# Altium PCB QSTL_MicroDSUB_FFC.PcbDoc
Units mm, origin at the board's own origin, x right, y up, seen from the top; angles counter-clockwise.
Board outline 26 x 44 mm, 4 copper layers (Top Layer, L2, L3, Bottom Layer), stack 0.603 mm thick; 13 components, 25 nets, 87 pads, 506 vias.
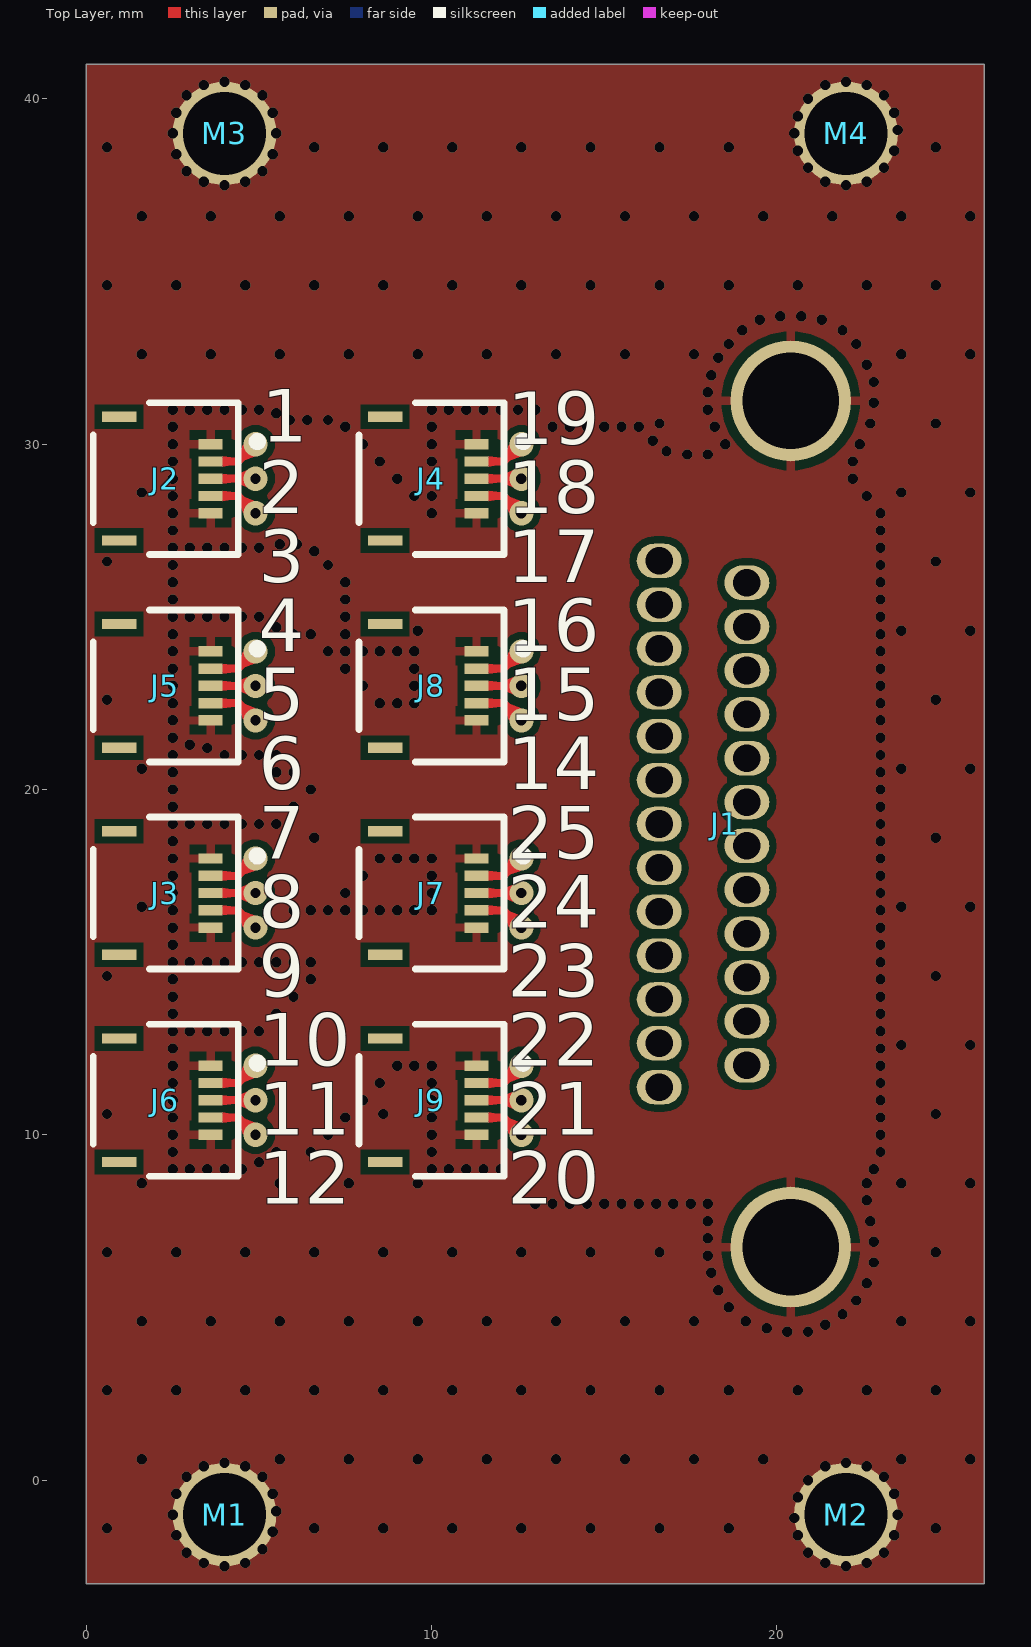
[diagram p0: Top Layer view]
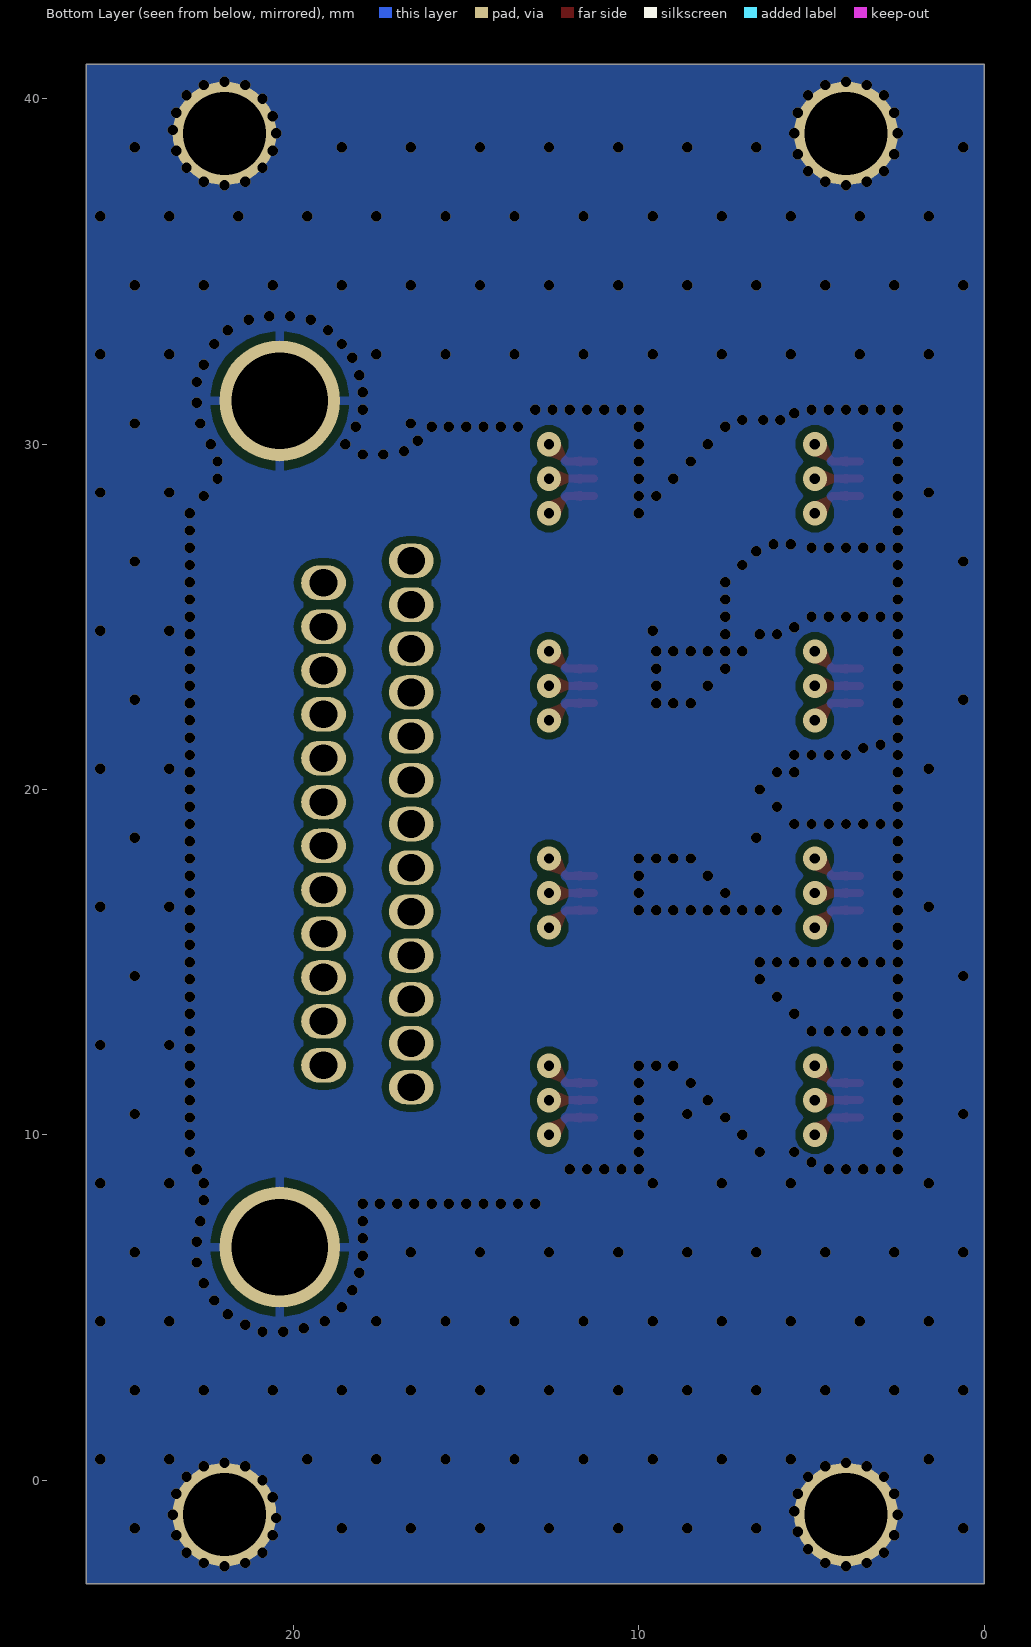
[diagram p1: Bottom Layer view, seen from below]
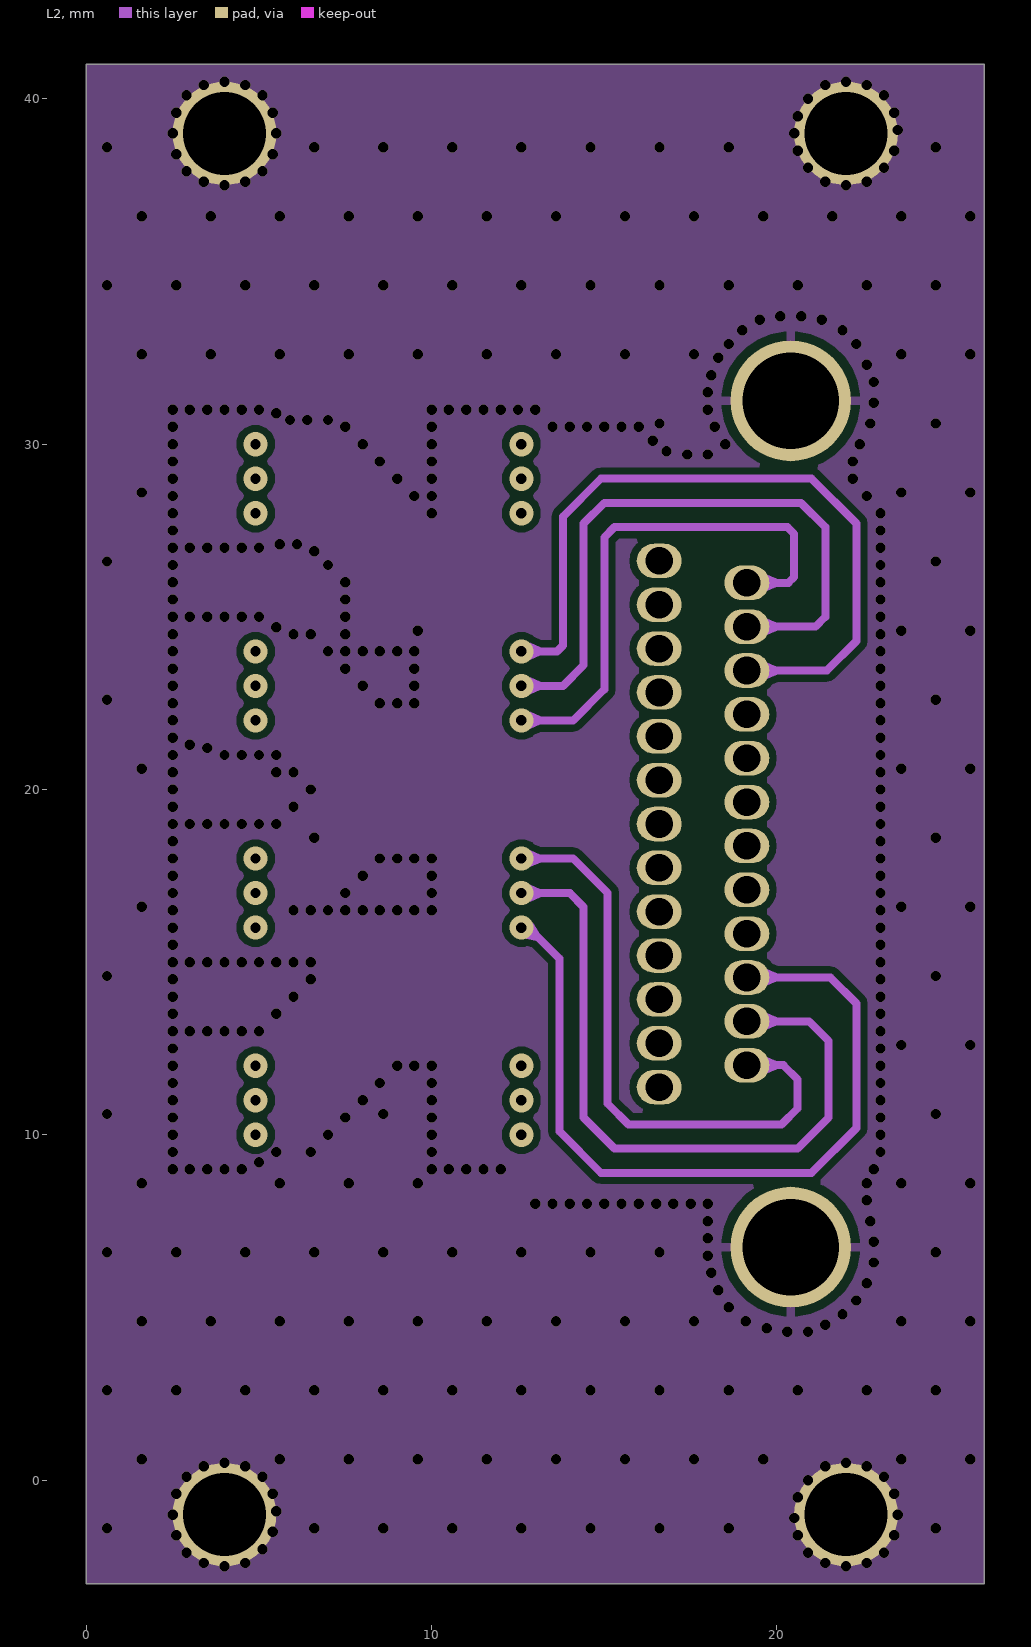
[diagram p2: L2]
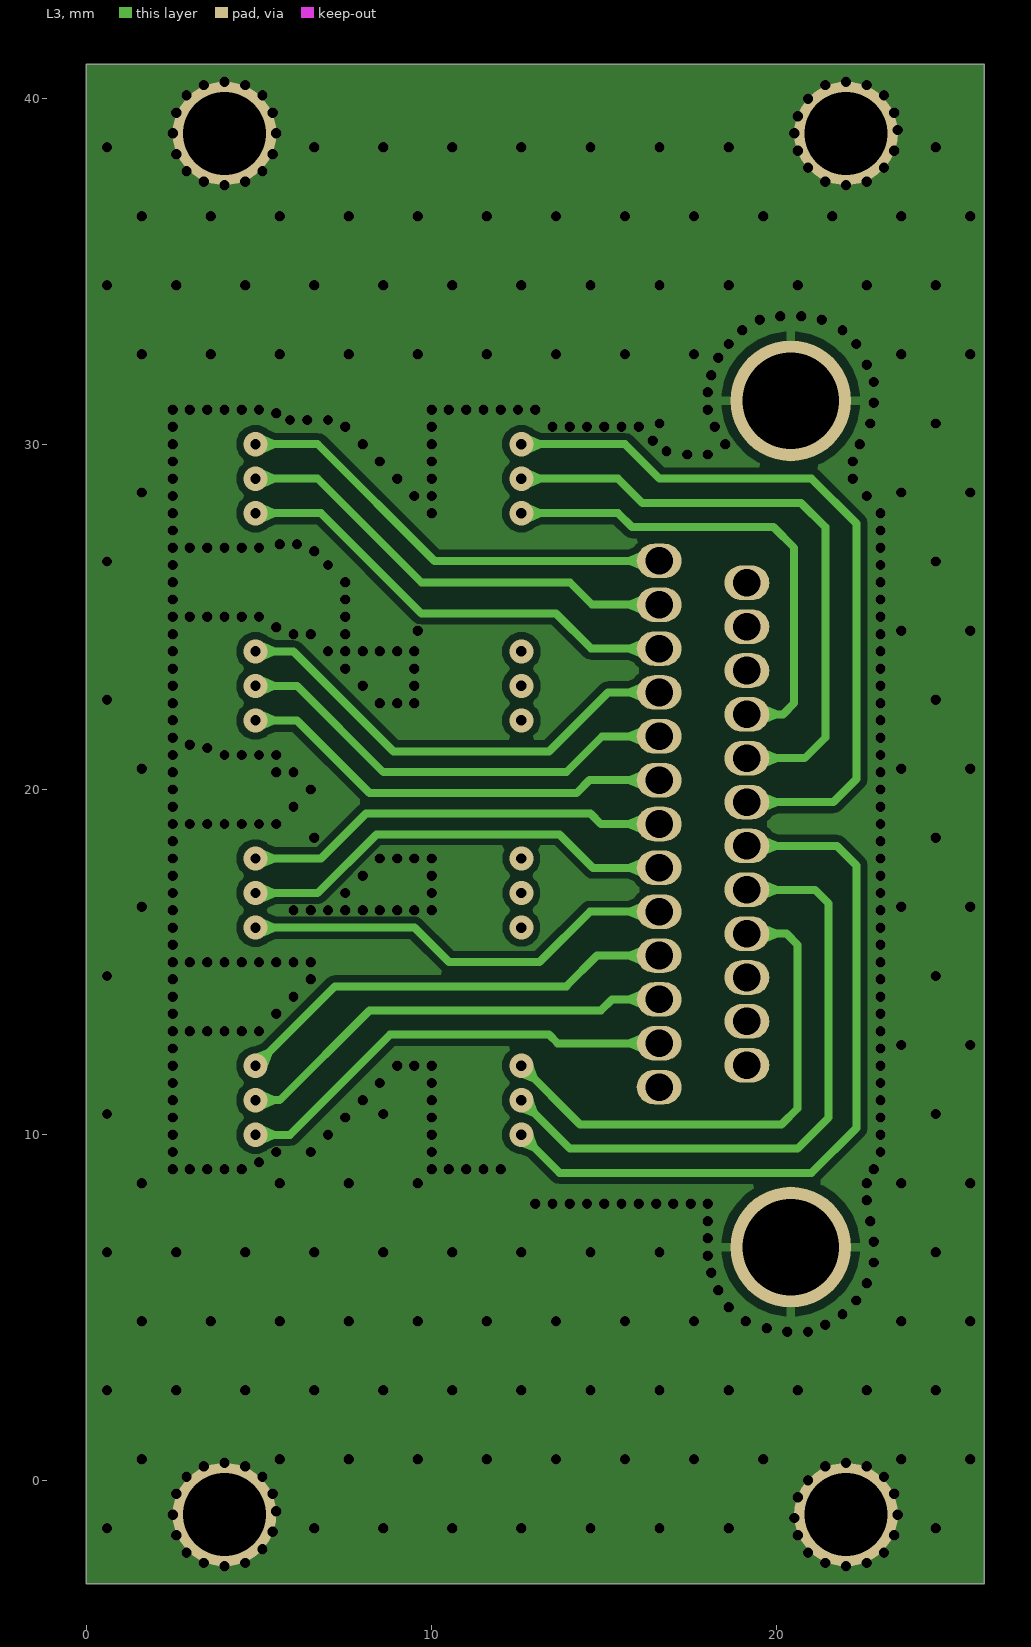
[diagram p3: L3]
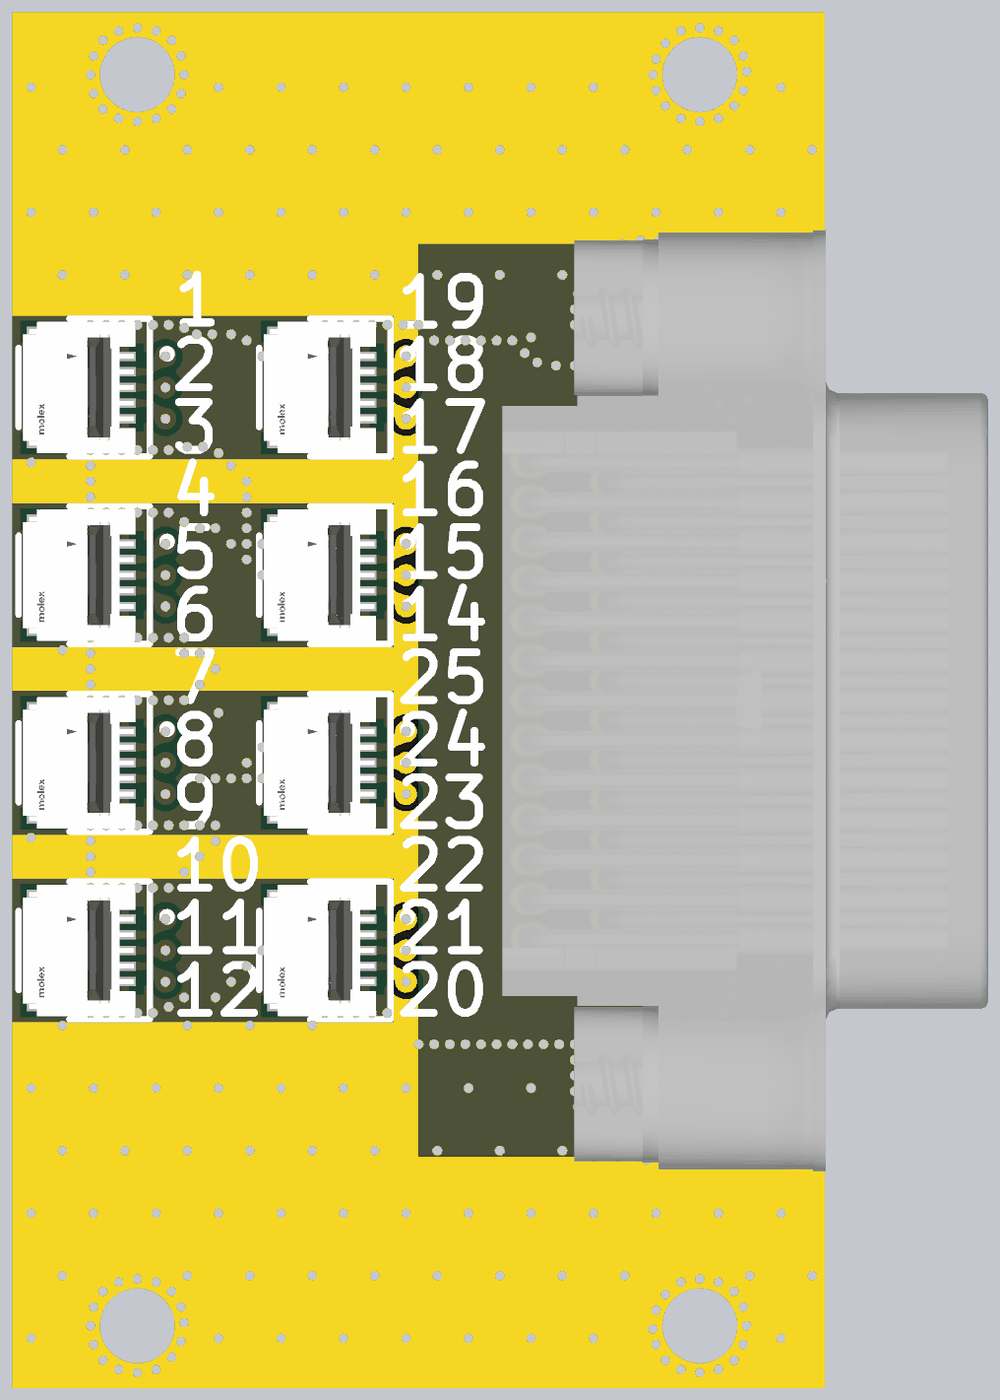
[diagram p4: 3D render of the assembled board from above, using the file's embedded part models]

## Layer stack, top to bottom
Top Solder: solder mask 0.0102, Solder Resist, Dk 3.5
Top Layer: signal copper 0.0356
Dielectric 2: prepreg 0.0711, PP-006, Dk 4.1
L2: signal copper 0.035
Dielectric 1: dielectric 0.32, FR-4, Dk 4.8
L3: signal copper 0.035
Dielectric 3: prepreg 0.0711, PP-006, Dk 4.1
Bottom Layer: signal copper 0.0356
Bottom Solder: solder mask 0.0102, Solder Resist, Dk 3.5

## Board outline
0,-3 26,-3 26,41 0,41

## Design rules (kind name [scope] priority, off if disabled: settings)
Clearance [All] p1: gap=0.2 ignorepadtopadclearanceinfootprint=FALSE except(0: Arc-Hole Track-Hole SMDPad-Hole THPad-Hole Via-Hole Fill-Hole Poly-Hole Region-Hole Text-Hole; 0.1: Arc-Arc Arc-Track Track-Track; 0.254: Arc-SMDPad Arc-THPad Arc-Text Track-SMDPad Track-THPad Track-Text SMDPad-SMDPad SMDPad-THPad SMDPad-Text THPad-THPad THPad-Text Via-Text Fill-Text Poly-Text Region-Text Text-Text)
MatchedLengths [1 or 2 or 3 or 4 or 5 or 6 or 7 or 8 or 9 or 10] p1: tolerance=25.4 checknetsindiffpair=FALSE checkdiffpairvsdiffpair=TRUE checkxsignals=TRUE checkothers=TRUE usedelayunits=TRUE delaytolerance=100.000000
PlaneConnect [All] p1: pad.planeconnectstyle=Relief pad.reliefexpansion=0.508 pad.reliefentries=4 pad.reliefconductorwidth=0.254 pad.reliefairgap=0.254 via.planeconnectstyle=Direct via.reliefexpansion=0.508 via.reliefentries=4 via.reliefconductorwidth=0.254 via.reliefairgap=0.254
PolygonConnect [All] p1: thpad.connectstyle=Direct thpad.reliefconductorwidth=0.254 thpad.reliefentries=4 thpad.polygonreliefangle="90 Angle" thpad.airgapwidth=0.254 smdpad.connectstyle=Relief smdpad.reliefconductorwidth=0.254 smdpad.reliefentries=4 smdpad.polygonreliefangle="90 Angle" smdpad.airgapwidth=0.254 via.connectstyle=Direct via.reliefconductorwidth=0.254 via.reliefentries=4 via.polygonreliefangle="90 Angle" via.airgapwidth=0.254
RoutingVias [All] p1: holewidth=0.711 width=1.27 viastyle="Through Hole" minholewidth=0.711 minwidth=1.27 maxholewidth=0.711 maxwidth=1.27
SolderMaskExpansion [All] p1: expansion=0.102 istentingtop=FALSE
Width [All] p1: maxlimit=0.294 minlimit=0.254 preferedwidth=0.294 toplayer_minwidth=0.294 midlayer1_maxwidth=0.254 midlayer1_prefwidth=0.254 midlayer2_maxwidth=0.254 midlayer2_prefwidth=0.254 bottomlayer_minwidth=0.294 minimp=50.000000 maximp=50.000000 favimp=50.000000
29 further rules are at their usual default settings.

## Components (designator, comment, footprint, x,y, rotation, side; value= is the part's Value field where it differs from the comment)
J1 "Socket 25 P Micro DSUB" 581-M25-213L461 19.13,19 r90 top locked
J2 "503480-0540" FP-503480-0540-MFG 2.3,29 r270 top locked
J3 "503480-0540" FP-503480-0540-MFG 2.3,17 r270 top locked
J4 "503480-0540" FP-503480-0540-MFG 10,29 r270 top locked
J5 "503480-0540" FP-503480-0540-MFG 2.3,23 r270 top locked
J6 "503480-0540" FP-503480-0540-MFG 2.3,11 r270 top locked
J7 "503480-0540" FP-503480-0540-MFG 10,17 r270 top locked
J8 "503480-0540" FP-503480-0540-MFG 10,23 r270 top locked
J9 "503480-0540" FP-503480-0540-MFG 10,11 r270 top locked
M1 "M2 Hole" M2_Hole 4,-1 r0 top locked
M2 "M2 Hole" M2_Hole 22,-1 r0 top locked
M3 "M2 Hole" M2_Hole 4,39 r0 top locked
M4 "M2 Hole" M2_Hole 22,39 r0 top locked

## Footprints (in the part's own frame and the unit in brackets; to place one, negate y for a bottom-side part, rotate by r counter-clockwise, add the part's x,y. Pads: shape width x height; smd on the part's side, far side on the other; paste and mask are expansions set on the pad)
581-M25-213L461 [mm]
  oval 1x1.3 hole 0.8: 1(7.62,2.54) 2(6.35,2.54) 3(5.08,2.54) 4(3.81,2.54) 5(2.54,2.54) 6(1.27,2.54) 7(0,2.54) 8(-1.27,2.54) 9(-2.54,2.54) 10(-3.81,2.54) 11(-5.08,2.54) 12(-6.35,2.54) 13(-7.62,2.54) 14(6.985,0) 15(5.715,0) 16(4.445,0) 17(3.175,0) 18(1.905,0) 19(0.635,0) 20(-0.635,0) 21(-1.905,0) 22(-3.175,0) 23(-4.445,0) 24(-5.715,0) 25(-6.985,0)
  round 3.5 hole 2.8: 26(-12.255,-1.27) 27(12.255,-1.27)
  body extent -15.07,-12.1 15.03,3.45, height 8.4
FP-503480-0540-MFG [mm]
  rect 0.3x0.7 smd paste+0 mask+0: 1(-1,1.3) 2(-0.5,1.3) 3(0,1.3) 4(0.5,1.3) 5(1,1.3)
  rect 0.3x1 smd paste+0 mask+0: 6(-1.79,-1.35) 7(1.79,-1.35)
  silkscreen extent -2.2,-2.1 2.2,2.78, body extent -2.3,-2.2 2.3,2.2, height 0.25
M2_Hole [mm]
  round 3 hole 2.4: 1(0,0)

## Part data
J1: library part 581-M25-213L461
J2 J3 J4 J5 J6 J7 J8 J9: library part CMP-00257-52963780-1, "503480-0540 Connector FFC/FPC SKT 5 Position 0.5mm Solder Right Angle Surface Mount T/R", Current Rating=500mA, Flammability Rating="UL94 V-0", Manufacturer Lifecycle Status=ACTIVE, Max Operating Temperature=85°C, Min Operating Temperature=-40°C, Voltage Rating=50V, Actuator Material="Glass, Nylon, Polyamide", Contact Material="Bronze, Gold, Nickel", Contact Plating=Gold, Country of Origin=KR, Halogen Free="Low Halogen", Height=2.07mm, Housing Material=Polymer, Lifecycle Status=Production, Mount="Surface Mount", NexarPartId=52963780, Number of Circuits=5, Number of Contacts=5, Number of Positions=5, Number of Rows=1, Orientation="Right Angle", Pitch=508µm, Plating=Gold, RoHS=Compliant, Termination=Solder, Wire/Cable Type=Straight
M1 M2 M3 M4: library part M2_HOLE

## Via types
v1: diameter 0.3, hole 0.3, Top Layer to Bottom Layer, tented both sides, 482 vias
v2: diameter 0.7, hole 0.3, Top Layer to Bottom Layer, tented both sides, 24 vias

## Nets (pads, with @x,y where several pads share a name; then routed paths per layer and width w, separated by ;. In a path a pad name is that pad's centre, name@x,y a point inside that pad or via, vN(x,y) a via of type N, cw(c..) or ccw(c..) an arc to the next point about the centre after c; other vN are vias at no path point)
1: J1.1 J2.2 | length 14.6
  Top Layer w0.232: J2.2 4.391,29.5 4.891,30 v2(4.9,30)
  L3 w0.232: v2(4.9,30) 6.7,30 10.08,26.62 J1.1
2: J1.2 J2.3 | length 14.5
  Top Layer w0.232: J2.3 v2(4.9,29)
  L3 w0.232: v2(4.9,29) 6.7,29 9.7,26 14,26 14.65,25.35 J1.2
3: J1.3 J2.4 | length 14.8
  Top Layer w0.232: J2.4 4.4,28.5 v2(4.9,28)
  L3 w0.232: v2(4.9,28) 6.8,28 9.7,25.1 13.6,25.1 14.62,24.08 J1.3
4: J1.4 J5.2 | length 15.1
  Top Layer w0.232: J5.2 4.391,23.5 4.891,24 v2(4.9,24)
  L3 w0.232: v2(4.9,24) 6,24 8.9,21.1 13.4,21.1 15.11,22.81 J1.4
5: J1.5 J5.3 | length 14.4
  Top Layer w0.232: J5.3 v2@4.881,23
  L3 w0.232: v2@4.905,23.024 4.928,23.001 6.099,23.001 8.6,20.5 13.9,20.5 14.94,21.54 J1.5
  other v2: 4.9,23
6: J1.6 J5.4 | length 14.2
  Top Layer w0.232: J5.4 4.414,22.5 4.9,22.014 v2(4.9,22)
  L3 w0.232: v2(4.9,22) 6.1,22 8.2,19.9 14.2,19.9 14.57,20.27 J1.6
7: J1.7 J3.2 | length 13.9
  Top Layer w0.232: J3.2 4.391,17.5 4.891,18 v2(4.9,18)
  L3 w0.232: v2(4.9,18) 6.8,18 8.1,19.3 14.6,19.3 14.9,19 J1.7
8: J1.8 J3.3 | length 14
  Top Layer w0.232: J3.3 v2@4.8,17
  L3 w0.232: v2(4.9,17) 6.7,17 8.4,18.7 13.7,18.7 14.67,17.73 J1.8
9: J1.9 J3.4 | length 14.1
  Top Layer w0.232: J3.4 4.391,16.5 4.891,16 v2(4.9,16)
  L3 w0.232: v2@4.975,16 9.5,16 10.5,15 13.125,15 14.585,16.46 J1.9
10: J1.10 J6.2 | length 14.5
  Top Layer w0.232: J6.2 4.4,11.5 v2(4.9,12)
  L3 w0.232: v2(4.9,12) 7.2,14.3 13.9,14.3 14.79,15.19 J1.10
11: J1.11 J6.3 | length 14.1
  Top Layer w0.232: J6.3 v2@4.8,11
  L3 w0.232: v2(4.9,11) 5.6,11 8.2,13.6 14.9,13.6 15.22,13.92 J1.11
12: J1.12 J6.4 | length 14.5
  Top Layer w0.232: J6.4 4.4,10.5 v2(4.9,10)
  L3 w0.232: v2(4.9,10) 5.9,10 8.8,12.9 13.4,12.9 13.65,12.65 J1.12
14: J1.14 J8.4 | length 17.1
  Top Layer w0.232: J8.4 12.091,22.5 12.591,22 v2(12.6,22)
  L2 w0.232: v2(12.6,22) 14.1,22 15,22.9 15,27.3 15.3,27.6 20.3,27.6 20.5,27.4 20.5,26.157 20.328,25.985 J1.14
15: J1.15 J8.3 | length 20
  Top Layer w0.232: J8.3 v2(12.6,23)
  L2 w0.232: v2(12.6,23) 13.8,23 14.4,23.6 14.4,27.7 15,28.3 20.7,28.3 21.4,27.6 21.4,25 21.115,24.715 J1.15
16: J1.16 J8.2 | length 22.9
  Top Layer w0.232: J8.2 12.091,23.5 12.591,24 v2(12.6,24)
  L2 w0.232: v2(12.6,24) 13.628,24 13.8,24.172 13.8,27.9 14.9,29 21,29 22.3,27.7 22.3,24.3 21.445,23.445 J1.16
17: J1.17 J4.4 | length 15.8
  Top Layer w0.232: J4.4 12.091,28.5 12.591,28 v2(12.6,28)
  L3 w0.232: v2(12.6,28) 15.4,28 15.8,27.6 19.9,27.6 20.5,27 20.5,22.5 20.175,22.175 J1.17
18: J1.18 J4.3 | length 19.3
  Top Layer w0.232: J4.3 v2(12.6,29)
  L3 w0.232: v2(12.6,29) 15.4,29 16.1,28.3 20.7,28.3 21.4,27.6 21.4,21.5 20.805,20.905 J1.18
19: J1.19 J4.2 | length 23
  Top Layer w0.232: J4.2 12.091,29.5 12.591,30 v2(12.6,30)
  L3 w0.232: v2(12.6,30) 15.6,30 16.6,29 21,29 22.3,27.7 22.3,20.3 21.635,19.635 J1.19
20: J1.20 J9.4 | length 23.2
  Top Layer w0.232: J9.4 12.091,10.5 12.591,10 v2(12.6,10)
  L3 w0.232: v2(12.6,10) 13.7,8.9 21,8.9 22.3,10.2 22.3,17.8 21.735,18.365 J1.20
21: J1.21 J9.3 | length 19.9
  Top Layer w0.232: J9.3 v2(12.6,11)
  L3 w0.232: v2(12.6,11) 14,9.6 20.6,9.6 21.5,10.5 21.5,16.7 21.105,17.095 J1.21
22: J1.22 J9.2 | length 16.7
  Top Layer w0.232: J9.2 12.091,11.5 12.591,12 v2(12.6,12)
  L3 w0.232: v2(12.6,12) 14.3,10.3 20.133,10.3 20.6,10.767 20.6,15.5 20.275,15.825 J1.22
23: J1.23 J7.4 | length 24.8
  Top Layer w0.232: J7.4 12.091,16.5 12.591,16 v2(12.6,16)
  L2 w0.232: v2@12.6,16.2 13.7,15.1 13.7,10.1 14.9,8.9 21,8.9 22.3,10.2 22.3,13.8 21.545,14.555 J1.23
24: J1.24 J7.3 | length 22
  Top Layer w0.232: J7.3 v2(12.6,17)
  L2 w0.232: v2(12.6,17) 14,17 14.4,16.6 14.4,10.5 15.3,9.6 20.6,9.6 21.5,10.5 21.5,12.713 20.928,13.285 J1.24
25: J1.25 J7.2 | length 18.9
  Top Layer w0.232: J7.2 12.091,17.5 12.591,18 v2(12.6,18)
  L2 w0.232: v2(12.6,18) 14.1,18 15.1,17 15.1,10.9 15.7,10.3 20.133,10.3 20.6,10.767 20.6,11.6 20.185,12.015 J1.25
GND: J1.26 J1.27 J2.1 J2.5 J3.1 J3.5 J4.1 J4.5 J5.1 J5.5 J6.1 J6.5 J7.1 J7.5 J8.1 J8.5 J9.1 J9.5 M1.1 M2.1 M3.1 M4.1
  other v1: 4,-2.5 22,-2.5 3.4,-2.4 4.6,-2.4 21.4,-2.4 22.6,-2.4 2.9,-2.1 20.9,-2.1 23.1,-2.1 5.1,-2 2.6,-1.6 20.6,-1.6 23.4,-1.6 5.4,-1.5 0.6,-1.4 6.6,-1.4 8.6,-1.4 10.6,-1.4 12.6,-1.4 14.6,-1.4 16.6,-1.4 18.6,-1.4 24.6,-1.4 20.5,-1.1 2.5,-1 23.5,-1 5.5,-0.9 20.6,-0.5 2.6,-0.4 5.4,-0.4 23.4,-0.4 20.9,0 2.9,0.1 5.1,0.1 23.1,0.1 3.4,0.4 4.6,0.4 21.4,0.4 22.6,0.4 4,0.5 22,0.5 1.6,0.6 5.6,0.6 7.6,0.6 9.6,0.6 11.6,0.6 13.6,0.6 15.6,0.6 17.6,0.6 19.6,0.6 23.6,0.6 25.6,0.6 0.6,2.6 2.6,2.6 4.6,2.6 6.6,2.6 8.6,2.6 10.6,2.6 12.6,2.6 14.6,2.6 16.6,2.6 18.6,2.6 20.6,2.6 22.6,2.6 24.6,2.6 20.3,4.3 20.9,4.3 19.7,4.4 21.4,4.5 1.6,4.6 3.6,4.6 5.6,4.6 7.6,4.6 9.6,4.6 11.6,4.6 13.6,4.6 15.6,4.6 17.6,4.6 19.1,4.6 23.6,4.6 25.6,4.6 21.9,4.8 18.6,5 22.3,5.2 18.3,5.5 22.6,5.7 18.1,6 22.8,6.3 18,6.5 0.6,6.6 2.6,6.6 4.6,6.6 6.6,6.6 8.6,6.6 10.6,6.6 12.6,6.6 14.6,6.6 16.6,6.6 24.6,6.6 22.8,6.9 18,7 18,7.5 22.7,7.5 13,8 13.5,8 14,8 14.5,8 15,8 15.5,8 16,8 16.5,8 17,8 17,8 17.5,8 18,8 22.6,8.1 1.6,8.6 5.6,8.6 7.6,8.6 9.6,8.6 22.6,8.6 23.6,8.6 25.6,8.6 2.5,9 3,9 3.5,9 4,9 4.5,9 10,9 10.5,9 11,9 11.5,9 12,9 22.8,9 5,9.2 2.5,9.5 5.5,9.5 6.5,9.5 10,9.5 23,9.5 2.5,10 7,10 10,10 23,10 2.5,10.5 7.5,10.5 10,10.5 23,10.5 0.6,10.6 8.6,10.6 24.6,10.6 2.5,11 8,11 10,11 23,11 2.5,11.5 8.5,11.5 10,11.5 23,11.5 2.5,12 9,12 9.5,12 10,12 23,12 2.5,12.5 23,12.5 23.6,12.6 25.6,12.6 2.5,13 3,13 3.5,13 4,13 4.5,13 5,13 23,13 2.5,13.5 5.5,13.5 23,13.5 2.5,14 6,14 23,14 2.5,14.5 6.5,14.5 23,14.5 0.6,14.6 24.6,14.6 2.5,15 3,15 3.5,15 4,15 4.5,15 5,15 5.5,15 6,15 6.5,15 23,15 23,15 2.5,15.5 23,15.5 2.5,16 23,16 2.5,16.5 6,16.5 6.5,16.5 7,16.5 7.5,16.5 8,16.5 8.5,16.5 8.5,16.5 9,16.5 9.5,16.5 10,16.5 23,16.5 1.6,16.6 23.6,16.6 25.6,16.6 2.5,17 7.5,17 10,17 23,17 2.5,17.5 8,17.5 10,17.5 23,17.5 2.5,18 8.5,18 9,18 9.5,18 10,18 23,18 2.5,18.5 23,18.5 6.6,18.6 24.6,18.6 2.5,19 3,19 3.5,19 4,19 4.5,19 5,19 5.5,19 23,19 2.5,19.5 6,19.5 23,19.5 2.5,20 6.5,20 23,20 2.5,20.5 5.5,20.5 6,20.5 23,20.5 1.6,20.6 23.6,20.6 25.6,20.6 2.5,21 4,21 4.5,21 5,21 5.5,21 23,21 3.5,21.2 3,21.3 2.5,21.5 23,21.5 2.5,22 23,22 2.5,22.5 8.5,22.5 9,22.5 9.5,22.5 23,22.5 0.6,22.6 24.6,22.6 2.5,23 8,23 9.5,23 23,23 2.5,23.5 7.5,23.5 9.5,23.5 23,23.5 2.5,24 7,24 7.5,24 8,24 8.5,24 9,24 9.5,24 23,24 2.5,24.5 6,24.5 6.5,24.5 7.5,24.5 23,24.5 9.6,24.6 23.6,24.6 25.6,24.6 5.5,24.7 2.5,25 3,25 3.5,25 4,25 4.5,25 5,25 7.5,25 23,25 2.5,25.5 7.5,25.5 23,25.5 2.5,26 7.5,26 23,26 2.5,26.5 7,26.5 23,26.5 0.6,26.6 24.6,26.6 6.6,26.9 2.5,27 3,27 3.5,27 4,27 4.5,27 5,27 23,27 5.6,27.1 6.1,27.1 2.5,27.5 23,27.5 2.5,28 10,28 23,28 2.5,28.5 9.5,28.5 10,28.5 22.6,28.5 1.6,28.6 23.6,28.6 25.6,28.6 2.5,29 9,29 10,29 22.2,29 2.5,29.5 8.5,29.5 10,29.5 22.2,29.5 17.4,29.7 18,29.7 16.8,29.8 2.5,30 8,30 10,30 18.5,30 22.4,30 16.4,30.1 2.5,30.5 7.5,30.5 10,30.5 13.5,30.5 14,30.5 14.5,30.5 15,30.5 15.5,30.5 16,30.5 18.2,30.5 16.6,30.6 22.7,30.6 24.6,30.6 5.9,30.7 5.9,30.7 6.4,30.7 7,30.7 5.5,30.9 2.5,31 3,31 3.5,31 4,31 4.5,31 5,31 10,31 10.5,31 11,31 11.5,31 12,31 12.5,31 13,31 18,31 22.8,31.2 18,31.5 22.8,31.8 18.1,32 22.6,32.3 18.3,32.5 1.6,32.6 3.6,32.6 5.6,32.6 7.6,32.6 9.6,32.6 11.6,32.6 13.6,32.6 15.6,32.6 17.6,32.6 23.6,32.6 25.6,32.6 18.6,32.9 22.3,32.9 19,33.3 21.9,33.3 19.5,33.6 21.3,33.6 20.1,33.7 20.7,33.7 20.7,33.7 0.6,34.6 2.6,34.6 4.6,34.6 6.6,34.6 8.6,34.6 10.6,34.6 12.6,34.6 14.6,34.6 16.6,34.6 18.6,34.6 20.6,34.6 22.6,34.6 24.6,34.6 1.6,36.6 3.6,36.6 5.6,36.6 7.6,36.6 9.6,36.6 11.6,36.6 13.6,36.6 15.6,36.6 17.6,36.6 19.6,36.6 21.6,36.6 23.6,36.6 25.6,36.6 4,37.5 22,37.5 3.4,37.6 4.6,37.6 21.4,37.6 22.6,37.6 2.9,37.9 5.1,37.9 20.9,38 23.1,38 2.6,38.4 5.4,38.4 20.6,38.5 23.4,38.5 0.6,38.6 6.6,38.6 8.6,38.6 10.6,38.6 12.6,38.6 14.6,38.6 16.6,38.6 18.6,38.6 24.6,38.6 2.5,39 5.5,39 20.5,39 23.5,39.1 20.6,39.5 2.6,39.6 5.4,39.6 23.4,39.6 20.9,40 2.9,40.1 5.1,40.1 23.1,40.1 3.4,40.4 4.6,40.4 21.4,40.4 22.6,40.4 4,40.5 22,40.5
pads on no net: J1.13 J2.6 J2.7 J3.6 J3.7 J4.6 J4.7 J5.6 J5.7 J6.6 J6.7 J7.6 J7.7 J8.6 J8.7 J9.6 J9.7

## Polygon pours and split planes (outlines as drawn)
no net on Bottom Solder (solid): 0,-3 26,-3 26,41 0,41
no net on Top Solder "GND_L01_P-001" (solid): 0,-3 26,-3 26,41 0,41
GND on Bottom Layer "GND_L01_P-001" (solid, remove dead copper, pour order 15): 0,-3 26,-3 26,41 0,41
GND on L2 "GND_L01_P-001" (solid, remove dead copper, pour order 16): 0,-3 26,-3 26,41 0,41
GND on L3 "GND_L01_P-001" (solid, remove dead copper, pour order 17): 0,-3 26,-3 26,41 0,41
GND on Top Layer "GND_L01_P-001" (solid, remove dead copper, pour order 14): 0,-3 26,-3 26,41 0,41

## Silkscreen, mask and mechanical layers (free items; w line width, h text height)
Top Overlay:
  text "1" at 5.075,30.075 h1.52
  text "19" at 12.2,30 h1.52
  text "2" at 5,28 h1.52
  text "18" at 12.2,28 h1.52
  text "3" at 5,26 h1.52
  text "17" at 12.2,26 h1.52
  text "4" at 5,24 h1.52
  text "16" at 12.2,24 h1.52
  text "5" at 5,22 h1.52
  text "15" at 12.2,22 h1.52
  text "6" at 5,20 h1.52
  text "14" at 12.2,20 h1.52
  text "7" at 5,18 h1.52
  text "25" at 12.2,18 h1.52
  text "8" at 5,16 h1.52
  text "24" at 12.2,16 h1.52
  text "9" at 5,14 h1.52
  text "23" at 12.2,14 h1.52
  text "10" at 5,12 h1.52
  text "22" at 12.2,12 h1.52
  text "11" at 5,10 h1.52
  text "21" at 12.2,10 h1.52
  text "12" at 5,8 h1.52
  text "20" at 12.2,8 h1.52
Top Solder:
  pour cut-out: 13,4.4 26,4.4 26,33.6 13,33.6
  pour cut-out: 0,26.7 12.2,26.7 12.2,31.3 0,31.3
  pour cut-out: 0,20.7 12.2,20.7 12.2,25.3 0,25.3
  pour cut-out: 0,14.7 12.2,14.7 12.2,19.3 0,19.3
  pour cut-out: 0,8.7 12.2,8.7 12.2,13.3 0,13.3
Bottom Solder:
  pour cut-out: 15,10 21,10 21,28 15,28
Mechanical 1:
  the board outline again, w0.254